# EAGLE board RGB_Fan_Controller_Rev_A_broken (EAGLE 5.06)
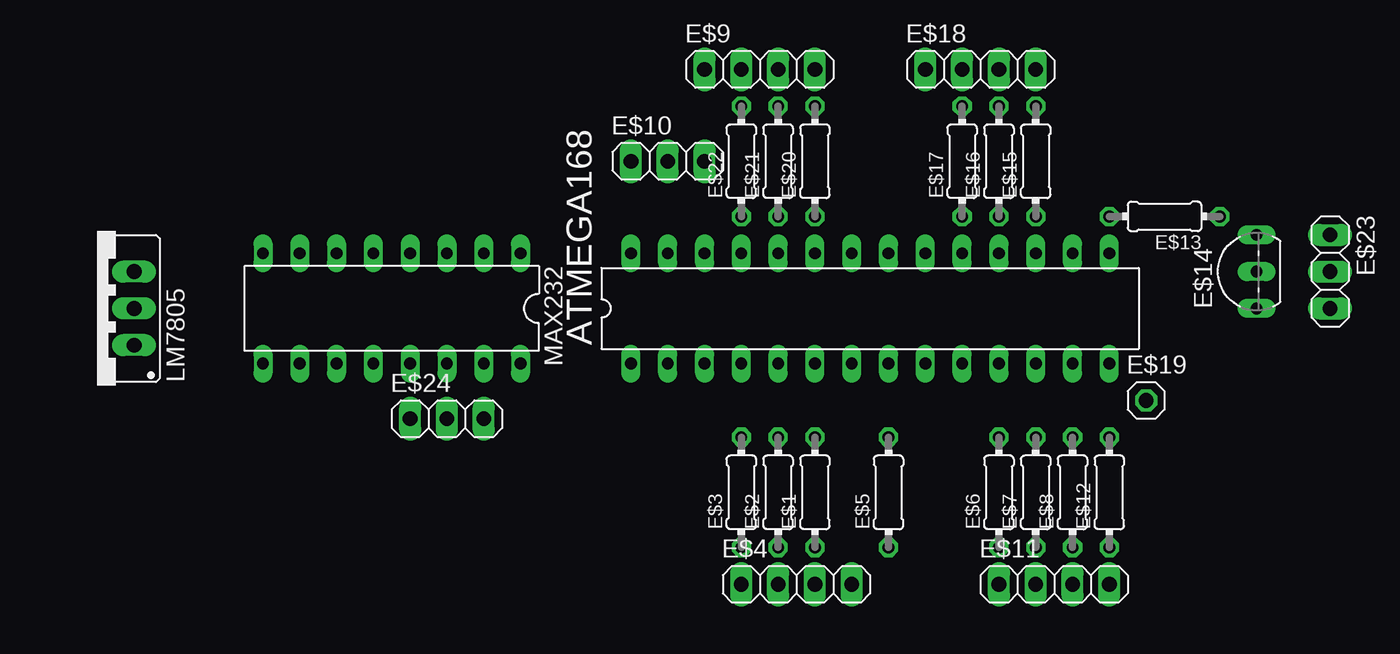
[diagram p0: board, top side]
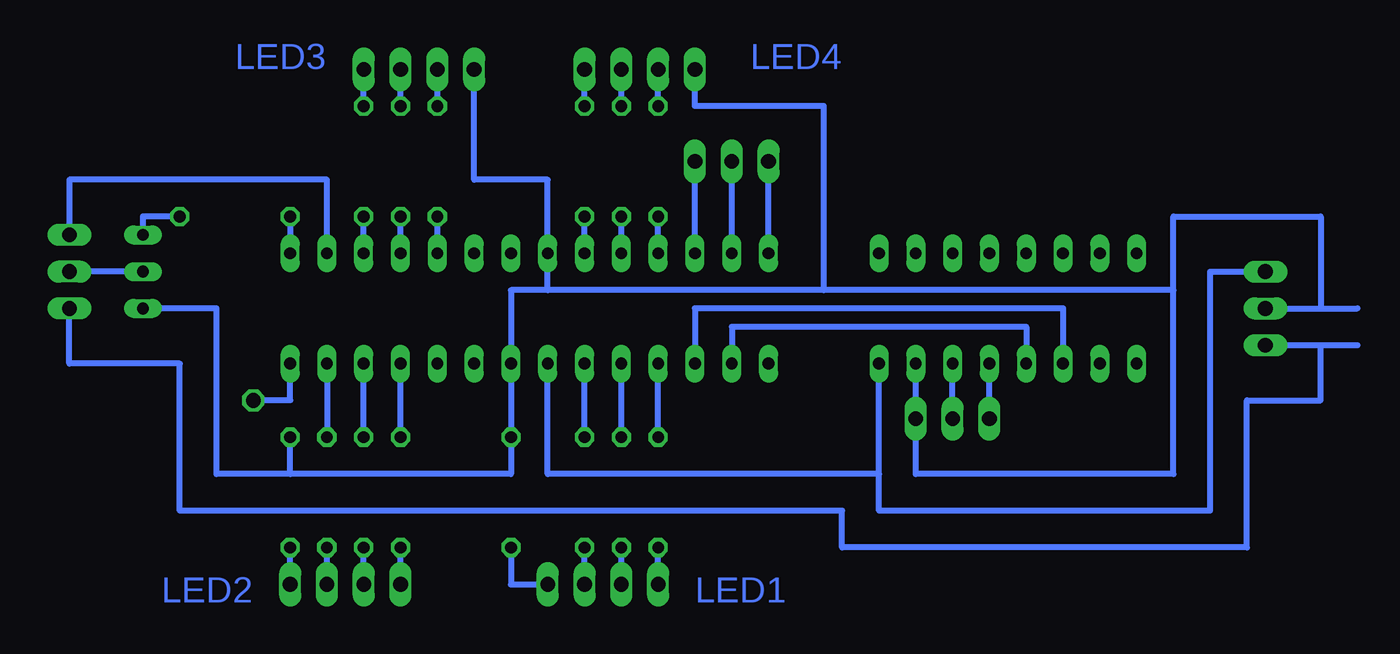
[diagram p1: board, bottom side, seen from below]

No outline drawn. Coordinates in mm, seen from the top.
Copper layers (1*16): Top 0.035mm / dielectric 1.5mm / Bottom 0.035mm
Design rules "default": minimum track width 10mil, minimum drill 24mil, track to track 8mil, track to pad 8mil, pad to pad 8mil, via to via 8mil, smd to smd 8mil, copper to edge 40mil, drill to drill 8mil, minimum pad ring 10mil, minimum via ring 8mil, stop-mask expansion 4mil, vias tented up to drill 0mil, thermal gap 10mil

## Footprints (pad centres in the part's own frame; a part is rotated, then mirrored left to right if it is on the bottom)
DIL28-3 = drill 0.813 long: 1 -16.51,-3.81; 2 -13.97,-3.81; 3 -11.43,-3.81; 4 -8.89,-3.81; 5 -6.35,-3.81; 6 -3.81,-3.81; 7 -1.27,-3.81; 8 1.27,-3.81; 9 3.81,-3.81; 10 6.35,-3.81; 11 8.89,-3.81; 12 11.43,-3.81; 13 13.97,-3.81; 14 16.51,-3.81; 15 16.51,3.81; 16 13.97,3.81; 17 11.43,3.81; 18 8.89,3.81; 19 6.35,3.81; 20 3.81,3.81; 21 1.27,3.81; 22 -1.27,3.81; 23 -3.81,3.81; 24 -6.35,3.81; 25 -8.89,3.81; 26 -11.43,3.81; 27 -13.97,3.81; 28 -16.51,3.81
0204/7 = drill 0.813 octagon: 1 -3.81,0; 2 3.81,0
1X04 = drill 1.016 long: 1 -3.81,0; 2 -1.27,0; 3 1.27,0; 4 3.81,0
1X03 = drill 1.016 long: 1 -2.54,0; 2 0,0; 3 2.54,0
TO92-ECB = drill 0.813 long: B 2.54,0; C 0,0; E -2.54,0
1X01 = drill 1.016 octagon: 1 0,0
78XXS = drill 1.016 long: GND 0,-2.54; IN -2.54,-2.54; OUT 2.54,-2.54
DIL16 = drill 0.813 long: 1 -8.89,-3.81; 2 -6.35,-3.81; 3 -3.81,-3.81; 4 -1.27,-3.81; 5 1.27,-3.81; 6 3.81,-3.81; 7 6.35,-3.81; 8 8.89,-3.81; 9 8.89,3.81; 10 6.35,3.81; 11 3.81,3.81; 12 1.27,3.81; 13 -1.27,3.81; 14 -3.81,3.81; 15 -6.35,3.81; 16 -8.89,3.81

## Placement (x,y rotation side)
ATMEGA168  [DIL28-3]  69.85,21.59 0 top
E$1  [0204/7]  66.04,8.89 90 top
E$2  [0204/7]  63.5,8.89 90 top
E$3  [0204/7]  60.96,8.89 90 top
E$4  [1X04]  64.77,2.54 0 top
E$5  [0204/7]  71.12,8.89 90 top
E$6  [0204/7]  78.74,8.89 90 top
E$7  [0204/7]  81.28,8.89 90 top
E$8  [0204/7]  83.82,8.89 90 top
E$9  [1X04]  62.23,38.1 0 top
E$10  [1X03]  55.88,31.75 0 top
E$11  [1X04]  82.55,2.54 0 top
E$12  [0204/7]  86.36,8.89 90 top
E$13  [0204/7]  90.17,27.94 180 top
E$14  [TO92-ECB]  96.52,24.13 90 top
E$15  [0204/7]  81.28,31.75 90 top
E$16  [0204/7]  78.74,31.75 90 top
E$17  [0204/7]  76.2,31.75 90 top
E$18  [1X04]  77.47,38.1 0 top
E$19  [1X01]  88.9,15.24 0 top
E$20  [0204/7]  66.04,31.75 90 top
E$21  [0204/7]  63.5,31.75 90 top
E$22  [0204/7]  60.96,31.75 90 top
E$23  [1X03]  101.6,24.13 270 top
E$24  [1X03]  40.64,13.97 0 top
LM7805  [78XXS]  16.51,21.59 90 top
MAX232  [DIL16]  36.83,21.59 180 top

## Library data of the parts
ATMEGA168 = atmel
E$1-E$3 E$5-E$8 E$12 E$13 E$15-E$17 E$20-E$22 = resistor
E$4 E$9-E$11 E$18 E$19 E$23 E$24 = pinhead
E$14 = transistor-neu-to92
LM7805 = v-reg
MAX232 = maxim

## Nets
S$1: ATMEGA168.5 E$2.2
S$2: ATMEGA168.7 LM7805.OUT MAX232.16
S$3: ATMEGA168.2 MAX232.12
S$4: ATMEGA168.3 MAX232.11
S$5: ATMEGA168.15 E$13.2
S$6: ATMEGA168.4 E$3.2
S$7: ATMEGA168.23 E$20.1
S$8: ATMEGA168.13 E$8.2
S$9: LM7805.GND
S$10: E$4.4 E$5.1
S$11: E$1.1 E$4.3
S$12: E$2.1 E$4.2
S$13: E$3.1 E$4.1
S$14: ATMEGA168.12 E$7.2
S$15: ATMEGA168.11 E$6.2
S$16: ATMEGA168.6 E$1.2
S$17: E$6.1 E$11.1
S$18: E$7.1 E$11.2
S$19: E$8.1 E$11.3
S$20: E$11.4 E$12.1
S$21: ATMEGA168.24 E$21.1
S$22: E$13.1 E$14.B
S$23: E$14.C E$23.2
S$24: ATMEGA168.16 E$23.1
S$25: ATMEGA168.25 E$22.1
S$26: ATMEGA168.26 E$10.3
S$27: ATMEGA168.27 E$10.2
S$28: E$17.2 E$18.2
S$29: E$16.2 E$18.3
S$30: E$15.2 E$18.4
S$31: ATMEGA168.28 E$10.1
S$32: ATMEGA168.19 E$17.1
S$33: ATMEGA168.18 E$16.1
S$34: ATMEGA168.17 E$15.1
S$35: E$9.2 E$22.2
S$36: E$9.3 E$21.2
S$37: E$9.4 E$20.2
S$38: E$23.3
S$39: LM7805.IN
S$40: ATMEGA168.8 E$5.2 E$9.1 E$12.2 E$14.E E$18.1 MAX232.15
S$41: ATMEGA168.14 E$19.1
S$42: E$24.1 MAX232.13
S$43: E$24.2 MAX232.14

## Tracks (layer width: path | path; a pad name or v marks a point on that pad's centre or on a via)
S$1
  Bottom 0.406: E$2.2 ATMEGA168.5
S$2
  Bottom 0.406: ATMEGA168.7 68.58,10.16 45.72,10.16 | 45.72,10.16 MAX232.16 | 45.72,10.16 45.72,7.62 22.86,7.62 22.86,24.13 LM7805.OUT
S$3
  Bottom 0.406: ATMEGA168.2 55.88,20.32 35.56,20.32 MAX232.12
S$4
  Bottom 0.406: ATMEGA168.3 58.42,21.59 33.02,21.59 MAX232.11
S$5
  Bottom 0.406: E$13.2 ATMEGA168.15
S$6
  Bottom 0.406: E$3.2 ATMEGA168.4
S$7
  Bottom 0.406: ATMEGA168.23 E$20.1
S$8
  Bottom 0.406: ATMEGA168.13 E$8.2
S$9
  Bottom 0.406: LM7805.GND 12.7,21.59
S$10
  Bottom 0.406: E$5.1 71.12,2.54 E$4.4
S$11
  Bottom 0.406: E$4.3 E$1.1
S$12
  Bottom 0.406: E$4.2 E$2.1
S$13
  Bottom 0.406: E$4.1 E$3.1
S$14
  Bottom 0.406: E$7.2 ATMEGA168.12
S$15
  Bottom 0.406: E$6.2 ATMEGA168.11
S$16
  Bottom 0.406: E$1.2 ATMEGA168.6
S$17
  Bottom 0.406: E$11.1 E$6.1
S$18
  Bottom 0.406: E$11.2 E$7.1
S$19
  Bottom 0.406: E$11.3 E$8.1
S$20
  Bottom 0.406: E$11.4 E$12.1
S$21
  Bottom 0.406: ATMEGA168.24 E$21.1
S$22
  Bottom 0.406: E$13.1 96.52,27.94 E$14.B
S$23
  Bottom 0.406: E$14.C E$23.2
S$24
  Bottom 0.406: E$23.1 101.6,30.48 83.82,30.48 ATMEGA168.16
S$25
  Bottom 0.406: ATMEGA168.25 E$22.1
S$26
  Bottom 0.406: ATMEGA168.26 E$10.3
S$27
  Bottom 0.406: ATMEGA168.27 E$10.2
S$28
  Bottom 0.406: E$17.2 E$18.2
S$29
  Bottom 0.406: E$16.2 E$18.3
S$30
  Bottom 0.406: E$15.2 E$18.4
S$31
  Bottom 0.406: ATMEGA168.28 E$10.1
S$32
  Bottom 0.406: ATMEGA168.19 E$17.1
S$33
  Bottom 0.406: ATMEGA168.18 E$16.1
S$34
  Bottom 0.406: ATMEGA168.17 E$15.1
S$35
  Bottom 0.406: E$22.2 E$9.2
S$36
  Bottom 0.406: E$21.2 E$9.3
S$37
  Bottom 0.406: E$20.2 E$9.4
S$38
  Bottom 0.406: 15.24,19.05 15.24,15.24 20.32,15.24 20.32,5.08 48.26,5.08 48.26,7.62 93.98,7.62 93.98,17.78 101.6,17.78 E$23.3
S$39
  Bottom 0.406: LM7805.IN 12.7,19.05
S$40
  Bottom 0.406: MAX232.15 43.18,10.16 25.4,10.16 25.4,22.86 | E$14.E 91.44,21.59 91.44,10.16 86.36,10.16 | 86.36,10.16 E$12.2 | 86.36,10.16 71.12,10.16 E$5.2 ATMEGA168.8 71.12,22.86 68.58,22.86 | E$18.1 73.66,30.48 68.58,30.48 68.58,22.86 | E$9.1 58.42,35.56 49.53,35.56 49.53,22.86 | 49.53,22.86 68.58,22.86 | 25.4,22.86 49.53,22.86 | 25.4,22.86 25.4,27.94 15.24,27.94 15.24,21.59
S$41
  Bottom 0.406: E$19.1 86.36,15.24 ATMEGA168.14
S$42
  Bottom 0.406: E$24.1 MAX232.13
S$43
  Bottom 0.406: E$24.2 MAX232.14

## Text on the board
Bottom: LED4 | LED3 | LED1 | LED2